# EAGLE board frets (EAGLE 8.3.1)
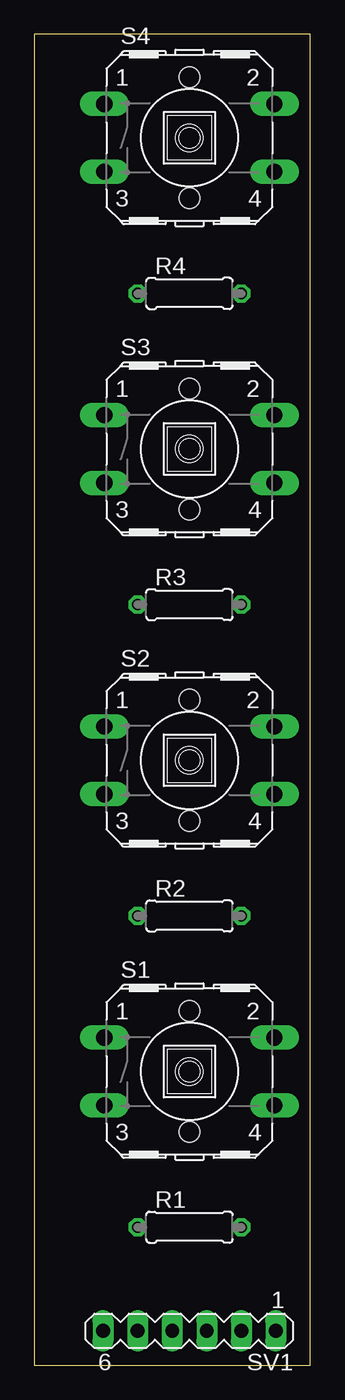
[diagram p0: board, top side]
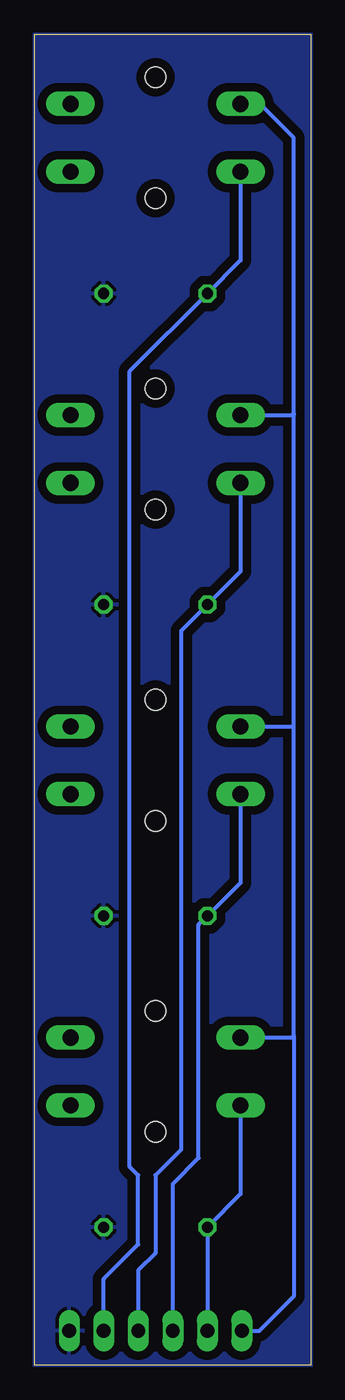
[diagram p1: board, bottom side, seen from below]

Size 20.32 x 97.79 mm. Coordinates in mm from the lower left corner, seen from the top.
Outline: 0,0 20.32,0 20.32,97.79 0,97.79 0,0
Copper layers (1*16): Top 0.035mm / dielectric 1.5mm / Bottom 0.035mm
Design rules "default *": minimum track width 6mil, minimum drill 0.35mm, track to track 6mil, track to pad 6mil, pad to pad 6mil, via to via 6mil, smd to smd 6mil, copper to edge 0mil, drill to drill 6mil, minimum pad ring 10mil, minimum via ring 8mil, stop-mask expansion 4mil, vias tented up to drill 0mil, thermal gap 10mil
Holes 1.52 mm at 11.43,94.61 11.43,85.72 11.43,71.75 11.43,62.87 11.43,48.9 11.43,40.01 11.43,26.04 11.43,17.14

## Footprints (pad centres in the part's own frame; a part is rotated, then mirrored left to right if it is on the bottom)
0207/7 = drill 0.813 octagon: 1 -3.81,0; 2 3.81,0
RACON12 = drill 1.194 long: 1 -6.248,2.489; 2 6.248,2.489; 3 -6.248,-2.489; 4 6.248,-2.489
MA06-1 = drill 1.016 long: 1 -6.35,0; 2 -3.81,0; 3 -1.27,0; 4 1.27,0; 5 3.81,0; 6 6.35,0

## Placement (x,y rotation side)
R1  10k  [0207/7]  11.43,10.16 0 top
R2  10k  [0207/7]  11.43,33.02 0 top
R3  10k  [0207/7]  11.43,55.88 0 top
R4  10k  [0207/7]  11.43,78.74 0 top
S1  RACON12  [RACON12]  11.43,21.59 0 top
S2  RACON12  [RACON12]  11.43,44.45 0 top
S3  RACON12  [RACON12]  11.43,67.31 0 top
S4  RACON12  [RACON12]  11.43,90.17 0 top
SV1  [MA06-1]  11.43,2.54 180 top

## Library data of the parts
R1-R4 = rcl
S1-S4 = switch-misc
SV1 = con-lstb; OC_FARNELL: unknown; OC_NEWARK: unknown

## Nets
B1: R1.1 S1.3 SV1.5
B2: R2.1 S2.3 SV1.4
B3: R3.1 S3.3 SV1.3
B4: R4.1 S4.3 SV1.2
GND: R1.2 R2.2 R3.2 R4.2 SV1.1
VCC: S1.1 S2.1 S3.1 S4.1 SV1.6

## Tracks (layer width: path | path; a pad name or v marks a point on that pad's centre or on a via)
B1
  Bottom 0.305: SV1.5 R1.1 5.18,12.6 S1.3
B2
  Bottom 0.305: S2.3 5.18,35.46 R2.1 8.26,32.38 8.26,15.24 10.16,13.34 10.16,10.16 SV1.4
B3
  Bottom 0.305: S3.3 5.18,58.32 R3.1 9.53,53.98 9.53,15.88 11.43,13.97 11.43,8.26 12.7,6.99 SV1.3
B4
  Bottom 0.305: S4.3 5.18,81.18 R4.1 13.34,73.03 13.34,14.61 12.7,13.97 12.7,8.89 15.24,6.35 SV1.2
GND
  pour Bottom (isolate 0.635): 0,97.79 0,0 20.32,0 20.32,97.79
VCC
  Bottom 0.305: SV1.6 3.81,2.54 1.27,5.08 1.27,24.23 | 1.27,47.01 1.27,69.79 | 1.27,24.23 1.27,47.01 | 1.27,69.95 1.27,69.79 | 1.27,69.95 1.27,90.17 3.81,92.71 5.13,92.71 S4.1 | 1.28,69.8 1.27,69.79 | 1.33,46.95 1.34,46.94 | 1.33,46.95 1.27,47.01 | 1.27,24.23 1.42,24.08 S1.1 | S2.1 1.34,46.94 | 1.34,46.94 1.33,46.95 | S3.1 1.42,69.8 1.27,69.95